# Altium PCB pcb.PcbDoc
Units mil, origin at the board's own origin, x right, y up, seen from the top; angles counter-clockwise.
Board outline 1740 x 3120 mil, 2 copper layers (Top Layer, Bottom Layer); 17 components, 15 nets, 82 pads, 0 vias.
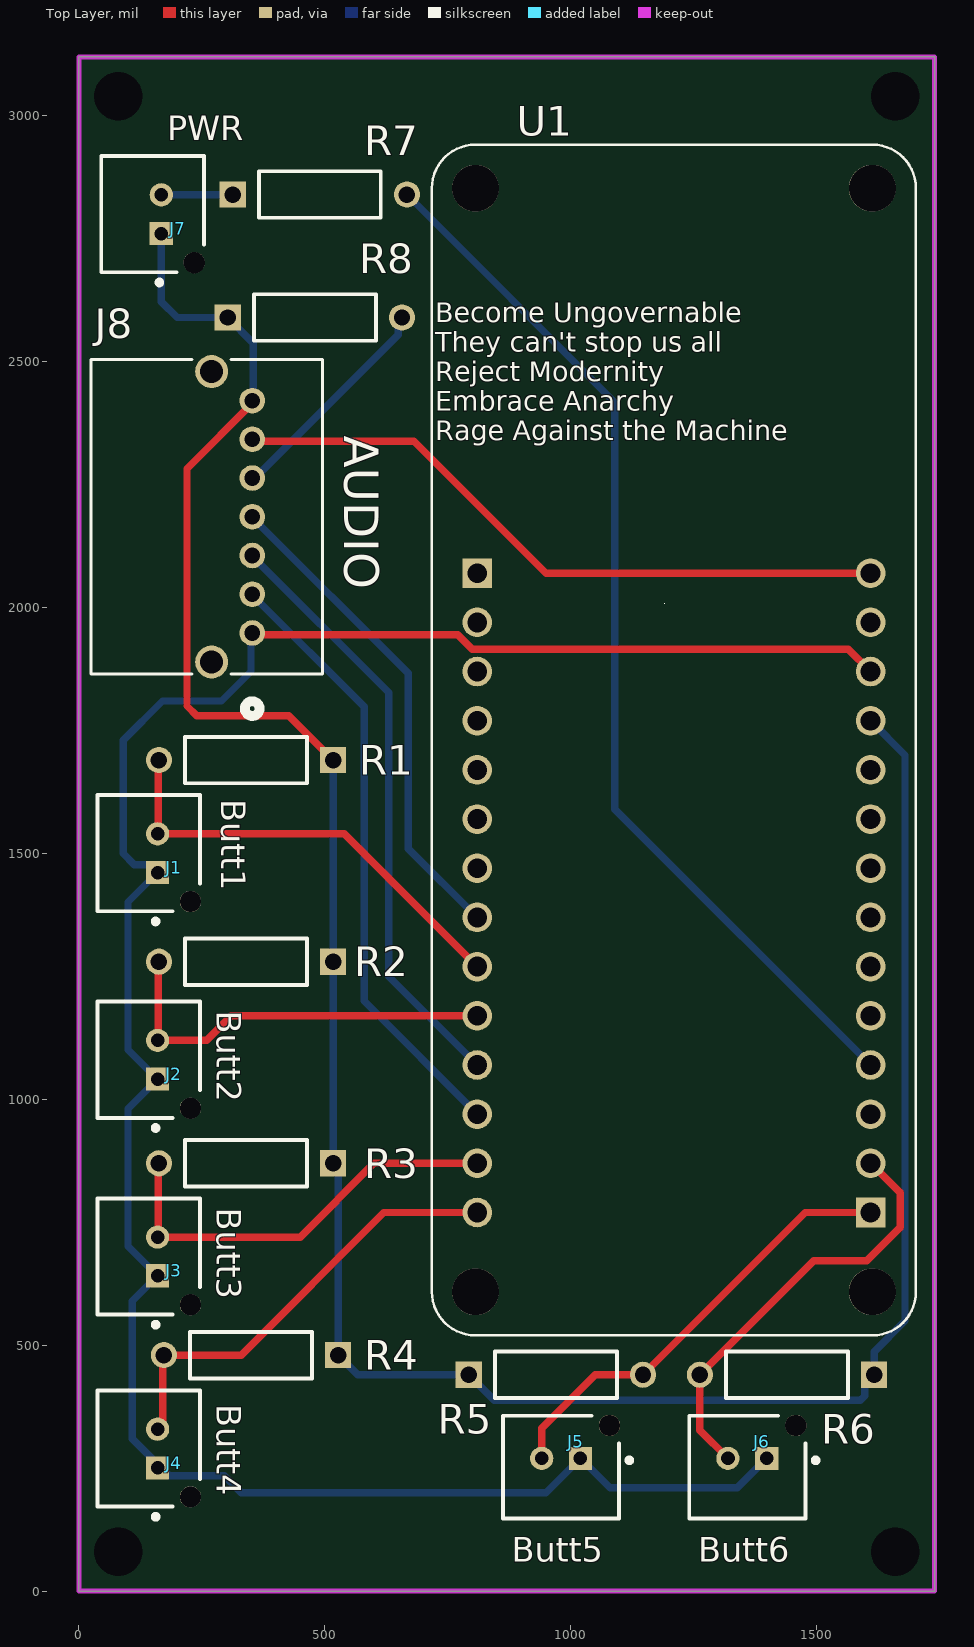
[diagram p0: Top Layer view]
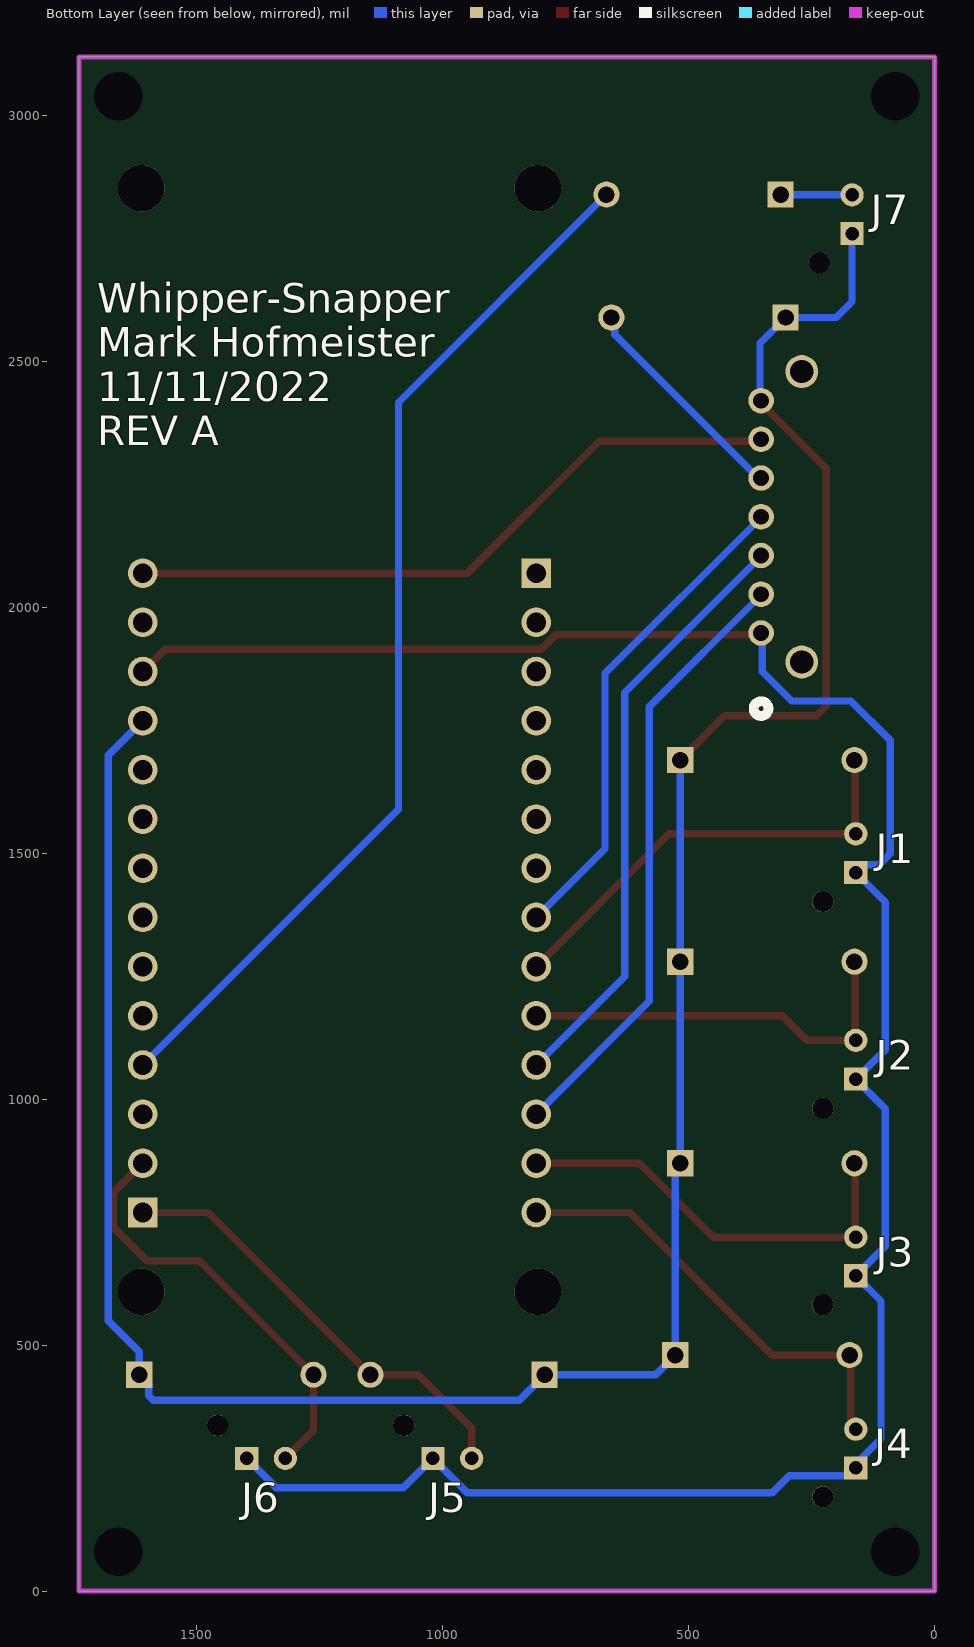
[diagram p1: Bottom Layer view, seen from below]

## Layer stack, top to bottom
Top Solder: solder mask 0.4, Solder Resist, Dk 3.5
Top Layer: signal copper 1.4
Dielectric 1: dielectric 12.6, FR-4, Dk 4.8
Bottom Layer: signal copper 1.4
Bottom Solder: solder mask 0.4, Solder Resist, Dk 3.5

## Board outline
0,0 1740,0 1740,3120 0,3120

## Design rules (kind name [scope] priority, off if disabled: settings)
BoardOutlineClearance [All] p1: gap=7.87 ignorepadtopadclearanceinfootprint=FALSE except(15.75: Arc-SplitBarrior Arc-SplitContinuation Track-SplitBarrior Track-SplitContinuation SMDPad-SplitBarrior SMDPad-SplitContinuation THPad-SplitBarrior THPad-SplitContinuation Via-SplitBarrior Via-SplitContinuation Fill-SplitBarrior Fill-SplitContinuation Poly-SplitBarrior Poly-SplitContinuation Region-SplitBarrior Region-SplitContinuation Text-SplitBarrior Text-SplitContinuation)
Clearance "Clearance Bottom Layer" [OnLayer('Bottom Layer')] p1: gap=8 ignorepadtopadclearanceinfootprint=TRUE except(10: Arc-Text Track-Text SMDPad-Text THPad-Text Via-Text Fill-Text Poly-Text Region-Text Text-Text)
Clearance "Clearance Top Layer" [OnLayer('Top Layer')] p2: gap=8 ignorepadtopadclearanceinfootprint=TRUE except(10: Arc-Text Track-Text SMDPad-Text THPad-Text Via-Text Fill-Text Poly-Text Region-Text Text-Text)
Clearance [All] p3: gap=7.87 ignorepadtopadclearanceinfootprint=FALSE except(3.5: Arc-Arc Arc-Track Arc-SMDPad Track-Track Track-SMDPad SMDPad-SMDPad; 5: Arc-Via Track-Via SMDPad-Via THPad-Via Via-Via; 10: Arc-Text Track-Text SMDPad-Text THPad-Text Via-Text Fill-Text Poly-Text Region-Text Text-Text)
HoleSize [All] p1: absolutevalues=TRUE maxlimit=248.03 minlimit=7.87 maxpercent=80.000 minpercent=20.000
MinimumAnnularRing [All] p1: minimumring=3
MinimumSolderMaskSliver [All] p1: minsoldermaskwidth=3.94
PolygonConnect PolygonConnect_1 [All] p1: thpad.connectstyle=Relief thpad.reliefconductorwidth=20 thpad.reliefentries=4 thpad.polygonreliefangle="90 Angle" thpad.airgapwidth=10 smdpad.connectstyle=Relief smdpad.reliefconductorwidth=20 smdpad.reliefentries=4 smdpad.polygonreliefangle="90 Angle" smdpad.airgapwidth=10 via.connectstyle=Direct via.reliefconductorwidth=20 via.reliefentries=4 via.polygonreliefangle="90 Angle" via.airgapwidth=10
RoutingCorners [All] p1: cornerstyle=Round minsetback=100 maxsetback=100
RoutingVias [All] p1: holewidth=19.68 width=39.37 viastyle="Through Hole" minholewidth=7.87 minwidth=17.72 maxholewidth=39.37 maxwidth=78.74
SilkToSilkClearance [All] p1: silktosilkclearance=3.94
SilkToSolderMaskClearance [IsPad] p1: minsilkscreentomaskgap=3.94 clearancetoexposedcopper=TRUE
SolderMaskExpansion [All] p1: expansion=4 istentingtop=FALSE
Width [All] p1: maxlimit=100 minlimit=3.5 preferedwidth=15
25 further rules are at their usual default settings.

## Components (designator, comment, footprint, x,y, rotation, side; value= is the part's Value field where it differs from the comment)
J1 "B02B-PASK-1(LF)(SN)" FP-B02B-PASK-1_LF_SN-MFG 142.28,1500.63 r270 top
J2 "B02B-PASK-1(LF)(SN)" FP-B02B-PASK-1_LF_SN-MFG 142.28,1080.63 r270 top
J3 "B02B-PASK-1(LF)(SN)" FP-B02B-PASK-1_LF_SN-MFG 142.28,680.63 r270 top
J4 "B02B-PASK-1(LF)(SN)" FP-B02B-PASK-1_LF_SN-MFG 142.28,290 r270 top
J5 "B02B-PASK-1(LF)(SN)" FP-B02B-PASK-1_LF_SN-MFG 980.63,252.28 r0 top
J6 "B02B-PASK-1(LF)(SN)" FP-B02B-PASK-1_LF_SN-MFG 1359.37,252.28 r0 top
J7 "B02B-PASK-1(LF)(SN)" FP-B02B-PASK-1_LF_SN-MFG 150,2800 r270 top
J8 "S07B-PASK-2(LF)(SN)_2" S07B-PASK-2(LF)(SN)_2-Footprint-1 267.68,2183.5 r90 top
R1 "1k Through-Hole 1/4W" RESA60-630X240 340,1690 r180 top
R2 "1k Through-Hole 1/4W" RESA60-630X240 340,1280 r180 top
R3 "1k Through-Hole 1/4W" RESA60-630X240 340,870 r180 top
R4 "1k Through-Hole 1/4W" RESA60-630X240 350,480 r180 top
R5 "1k Through-Hole 1/4W" RESA60-630X240 970,440 r0 top
R6 "1k Through-Hole 1/4W" RESA60-630X240 1440,440 r180 top
R7 "1k Through-Hole 1/4W" RESA60-630X240 490,2840 r0 top
R8 "1k Through-Hole 1/4W" RESA60-630X240 480,2590 r0 top
U1 "ARDUINO MKR ZERO" "ARDUINO MKR ZERO-Footprint-1" 1210,1730.82 r270 top

## Footprints (in the part's own frame and the unit in brackets; to place one, negate y for a bottom-side part, rotate by r counter-clockwise, add the part's x,y. Pads: shape width x height; smd on the part's side, far side on the other; paste and mask are expansions set on the pad)
"ARDUINO MKR ZERO-Footprint-1" [mm]
  rect 1.53x1.53 hole 1.02: J4_1(-8.615,-10.16) J5_1(24.405,10.16)
  round 1.53 hole 1.02: J4_2(-6.075,-10.16) J4_3(-3.535,-10.16) J4_4(-0.995,-10.16) J4_5(1.545,-10.16) J4_6(4.085,-10.16) J4_7(6.625,-10.16) J4_8(9.165,-10.16) J4_9(11.705,-10.16) J4_10(14.245,-10.16) J4_11(16.785,-10.16) J4_12(19.325,-10.16) J4_13(21.865,-10.16) J4_14(24.405,-10.16) J5_2(21.865,10.16) J5_3(19.325,10.16) J5_4(16.785,10.16) J5_5(14.245,10.16) J5_6(11.705,10.16) J5_7(9.165,10.16) J5_8(6.625,10.16) J5_9(4.085,10.16) J5_10(1.545,10.16) J5_11(-0.995,10.16) J5_12(-3.535,10.16) J5_13(-6.075,10.16) J5_14(-8.615,10.16)
  round 2.42 hole 2.42 unplated: ""(-28.5,-10.25) ""(-28.5,10.25) ""(28.5,-10.25) ""(28.5,10.25)
  silkscreen extent -30.75,-12.5 30.75,12.5
FP-B02B-PASK-1_LF_SN-MFG [mm]
  rect 1.2x1.2 hole 0.7 paste-1000 mask+0: 1(1,0.45)
  round 1.2 hole 0.7 paste-1000 mask+0: 2(-1,0.45)
  round 1.1 hole 1.1 unplated paste-1000 mask+0: ""(2.5,2.15)
  silkscreen extent -3,-2.65 3.65,2.65, body extent -3.1,-2.75 3.15,2.8, height 0.25
RESA60-630X240 [mm] "Axial Resistor, 2-Leads, Dia 2.4mm, Body Length 6.3mm"
  rect 1.35x1.35 hole 0.85: 1(-4.5,0)
  round 1.35 hole 0.85: 2(4.5,0)
  silkscreen extent -3.15,-1.2 3.15,1.2, body extent -3.15,-1.2 3.15,1.2, height 2.4
S07B-PASK-2(LF)(SN)_2-Footprint-1 [mil]
  round 52 hole 32 mask+0: 1(-235,-85) 2(-156.26,-85) 3(-77.52,-85) 4(1.22,-85) 5(79.96,-85) 6(158.7,-85) 7(237.44,-85)
  round 67 hole 47: 8(-294.06,-2.32) 9(296.5,-2.32)
  silkscreen extent -404,-228 321,243, body extent -235,-85 -225,-75, height 10

## Part data
J1 J2 J3 J4 J5 J6 J7: library part CMP-17439-000415-1, "CONN HEADER VERT 2POS 2MM", Color=Natural, Current Rating=3A, Flammability Rating="UL94 V-0", Housing Color=White, Insulation Resistance=1GR, Max Operating Temperature=85°C, Min Operating Temperature=-25°C, Voltage Rating=250V, Connector Type=Header, Contact Finish - Mating=TIN, Contact Material="Copper Alloy", Contact Mating Length=0.126inch, Contact Plating=Tin, Contact Shape=Square, Contact Type="Male Pin", Fastening Type=Ramp, Gender=Male, Insulation Color=Natural, Insulation Material=PBT, Lead Free="Lead Free", Mated Stacking Heights=14.9mm, Material=Polybutylene, Mount="Through Hole", Number of Contacts=2, Number of Positions=2, Number of Rows=1, Orientation=Straight, Packaging=Bulk, Pitch=2mm, Series=PA, Termination=Solder
J8: library part CMP-002-00095-1, "Conn Shrouded Header HDR 7 POS 2mm Solder RA Thru-Hole Box"
R1 R2 R3 R4 R5 R6 R7 R8: library part CMP-009-00195-1, "RES 1K OHM 1/4W 1% AXIAL", Case/Package=Axial, Max Operating Temperature=155°C, Max Power Dissipation=250mW, Min Operating Temperature=-55°C, Package Quantity=200, Resistance=1kR, Resistor Type="Metal Film", Temperature Coefficient=100ppm/°C, Tolerance=1%, Voltage Rating=250V, Voltage Rating (DC)=200V, Lead Diameter=0.6mm, Lead Free="Lead Free", Length=0.248inch, Mount="Through Hole", Number of Terminations=2, Packaging=Bulk, Power Rating=250mW, RoHS Compliant=Yes, Series=MFR, Termination=Axial, Width=6.3mm
U1: library part CMP-001-0003-1, "SEN PHT LO/DO M8 4PIN NO BRKT"

## Free pads (board coordinates)
  round 60 hole 98.43: 2(80,80) 2(80,3040) 2(1660,80) 2(1660,3040)

## Nets (pads, with @x,y where several pads share a name; then routed paths per layer and width w, separated by ;. In a path a pad name is that pad's centre, name@x,y a point inside that pad or via, vN(x,y) a via of type N, cw(c..) or ccw(c..) an arc to the next point about the centre after c; other vN are vias at no path point)
+5: J8.6 U1.J5_14 | length 1366.3
  Top Layer w15: J8.6@355,2338.7 681.3,2338.7 950,2070 U1.J5_14
BUTTON_1: J1.2 R1.2 U1.J4_9 | length 913
  Top Layer w15: R1.2 161.42,1688.58 161.42,1541.42 J1.2 540,1540 U1.J4_9
BUTTON_2: J2.2 R2.2 U1.J4_10 | length 831.9
  Top Layer w15: R2.2 161.42,1278.58 161.42,1121.42 J2.2 260,1120 310,1170 U1.J4_10
BUTTON_3: J3.2 R3.2 U1.J4_13 | length 863.3
  Top Layer w15: R3.2 161.42,868.58 161.42,721.42 J3.2 450,720 600,870 U1.J4_13
BUTTON_4: J4.2 R4.2 U1.J4_14 | length 910
  Top Layer w15: J4.2@167.72,329.37 170.28,331.93 170.28,477.44 R4.2 330,480 620,770 U1.J4_14
BUTTON_5: J5.2 R5.2 U1.J5_1 | length 911.7
  Top Layer w15: J5.2 941.26,331.26 1050,440 R5.2 1477.17,770 U1.J5_1
BUTTON_6: J6.2 R6.2 U1.J5_2 | length 880
  Top Layer w15: J6.2 1262.83,327.17 R6.2 1494.74,671.91 1601.91,671.91 1670,740 1670,810 U1.J5_2
GND: J7.1 J8.7 R1.1 R2.1 R3.1 R4.1 R5.1 R6.1 R8.1 U1.J5_11 | length 5259.9
  Top Layer w15: J8.7@355,2417.44 220,2282.44 220,1800 240,1780 427.17,1780 R1.1
  Bottom Layer w15: J7.1 167.72,2622.28 200,2590 R8.1 355,2537.83 J8.7@355,2417.44 ; R1.1 R2.1 R3.1 527.17,860 R4.1 567.17,440 R5.1 844.74,388.09 1589.3,388.09 1598.09,396.88 1598.09,420.93 R6.1 1617.17,487.17 1680,550 1680,1700 U1.J5_11
I2S_BCLK: J8.2 U1.J4_12 | length 1242.2
  Bottom Layer w15: J8.2@355,2023.74 580,1798.74 580,1200 U1.J4_12
I2S_DIN: J8.4 U1.J4_8 | length 999.7
  Bottom Layer w15: J8.4@355,2181.22 670,1866.22 670,1510 U1.J4_8
I2S_LRC: J8.3 U1.J4_11 | length 1220.9
  Bottom Layer w15: J8.3@355,2102.48 630,1827.48 630,1250 U1.J4_11
NetJ8_5: J8.5 R8.2 | length 455.2
  Bottom Layer w15: J8.5@355,2259.96 649.87,2554.83 649.87,2582.7 R8.2
NetR7_2: R7.2 U1.J5_4 | length 2160.5
  Bottom Layer w15: R7.2 1090,2417.17 1090,1590 U1.J5_4
PWR_LED: J7.2 R7.1 | length 145.4
  Bottom Layer w15: J7.2 312.2,2839.37 R7.1
VCC: J1.1 J2.1 J3.1 J4.1 J5.1 J6.1 J8.1 U1.J5_12 | length 4683.6
  Top Layer w15: J8.1@355,1945 770.49,1945 799.87,1915.62 1564.38,1915.62 U1.J5_12
  Bottom Layer w15: J8.1@355,1945 350,1940 350,1870 290,1810 170,1810 90,1730 90,1500 112.62,1477.38 143.88,1477.38 J1.1 100,1401.26 100,1101.26 J2.1 100,981.26 100,701.26 J3.1 108.74,590 108.74,309.61 167.72,250.63 183.84,234.51 295.49,234.51 330,200 950,200 J5.1 1080,210 1338.74,210 J6.1
pads on no net: J1. J2. J3. J4. J5. J6. J7. J8.8 J8.9 U1. U1.J4_1 U1.J4_2 U1.J4_3 U1.J4_4 U1.J4_5 U1.J4_6 U1.J4_7 U1.J5_3 U1.J5_5 U1.J5_6 U1.J5_7 U1.J5_8 U1.J5_9 U1.J5_10 U1.J5_13

## Keep-outs
Keep-Out Layer:
  the board outline again, w10

## Silkscreen, mask and mechanical layers (free items; w line width, h text height)
Top Overlay:
  region: 1190.14,2007.4 1190.14,2008.54 1191.28,2008.54 1191.28,2007.4
  text "PWR" at 180,2950 h50
  text "AUDIO" at 540,2350 h70 r270
  text "Become Ungovernable  / They can't stop us all / Reject Modernity / Embrace Anarchy / Rage Against the Machine" at 725,2340 h40
  text "Butt1" at 290,1610 h50 r270
  text "Butt2" at 280,1180 h50 r270
  text "Butt3" at 280,780 h50 r270
  text "The Industrial Revolution and its consequences have been a disaster for the human race. They have greatly increased the life-expectancy of those of us who live in advanced countries, but they have destabilized society, have made life unfulfilling, have subjected human beings to indignities, have led to widespread psychological suffering (in the Third World to physical suffering as well) and have inflicted severe damage on the natural world." at 860,600 h32
  text "Butt4" at 280,380 h50 r270
  text "Butt5" at 880,60 h50
  text "Butt6" at 1260,60 h50
Bottom Overlay:
  text "Whipper-Snapper  / Mark Hofmeister / 11/11/2022  / REV A" at 1702.41,2330 h60
  text "Here stands a concrete manifestation of an abstract idea. Let it be that which marries the two." at 1547.5,1040 h55